# Altium PCB NO2-CO2 Sensor.PcbDoc
Units mil, origin at the board's own origin, x right, y up, seen from the top; angles counter-clockwise.
Board outline 1525 x 1175 mil, 2 copper layers (Top Layer, Bottom Layer); 13 components, 14 nets, 52 pads, 7 vias.
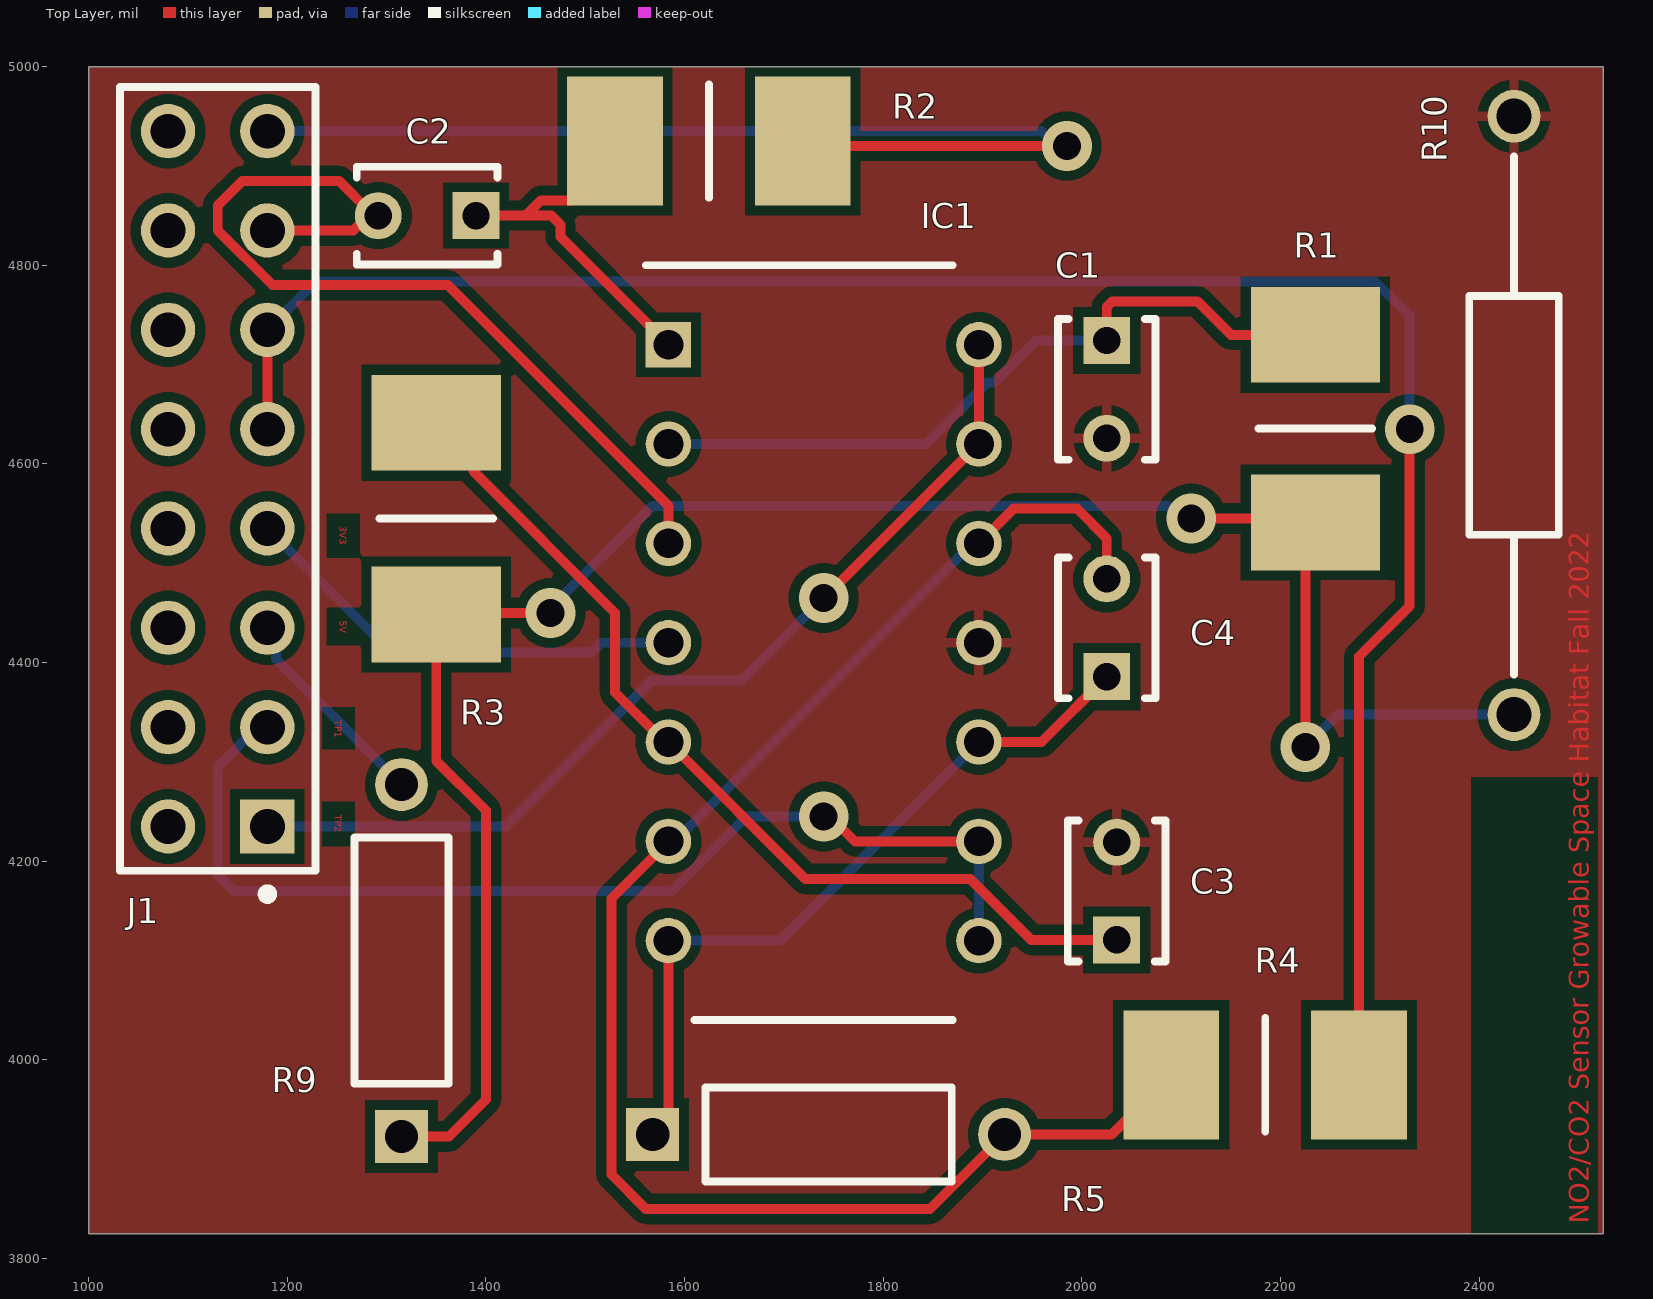
[diagram p0: Top Layer view]
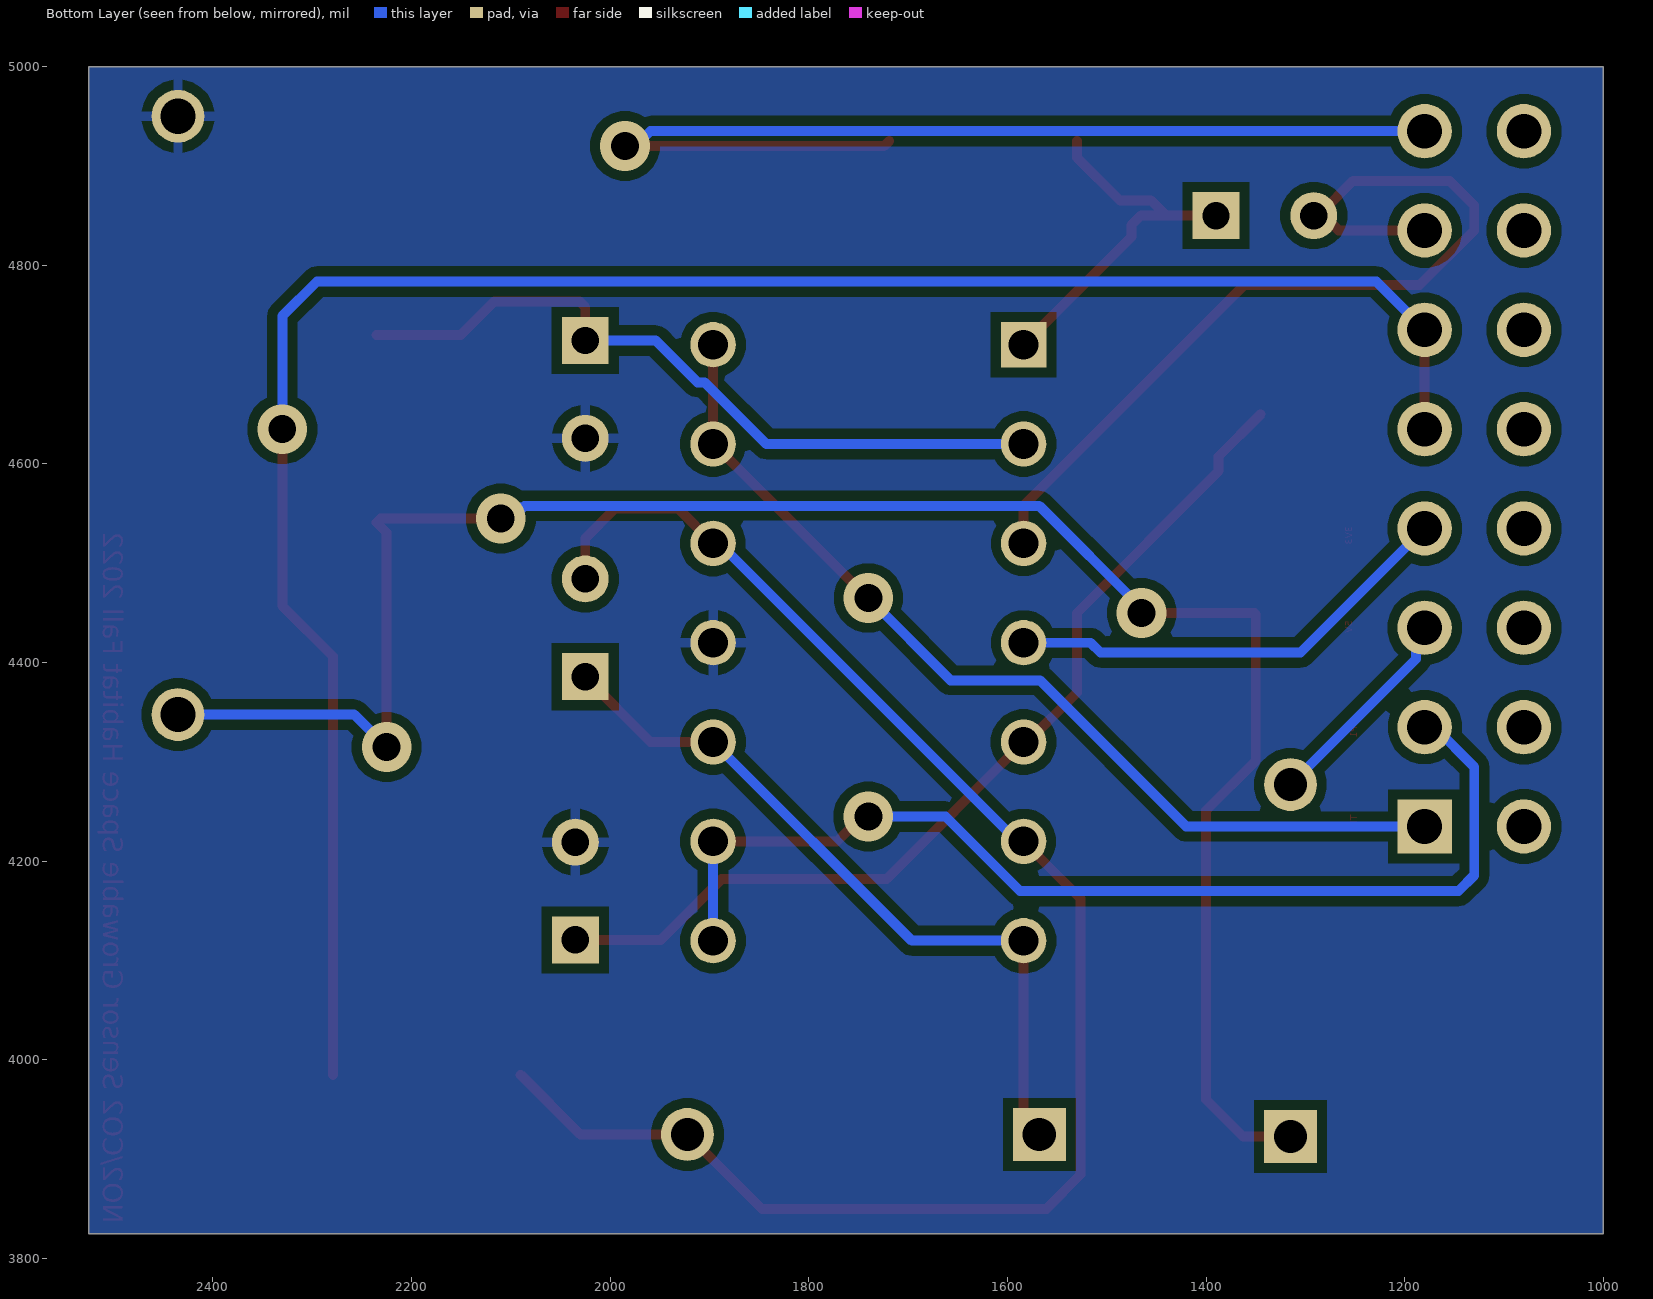
[diagram p1: Bottom Layer view, seen from below]
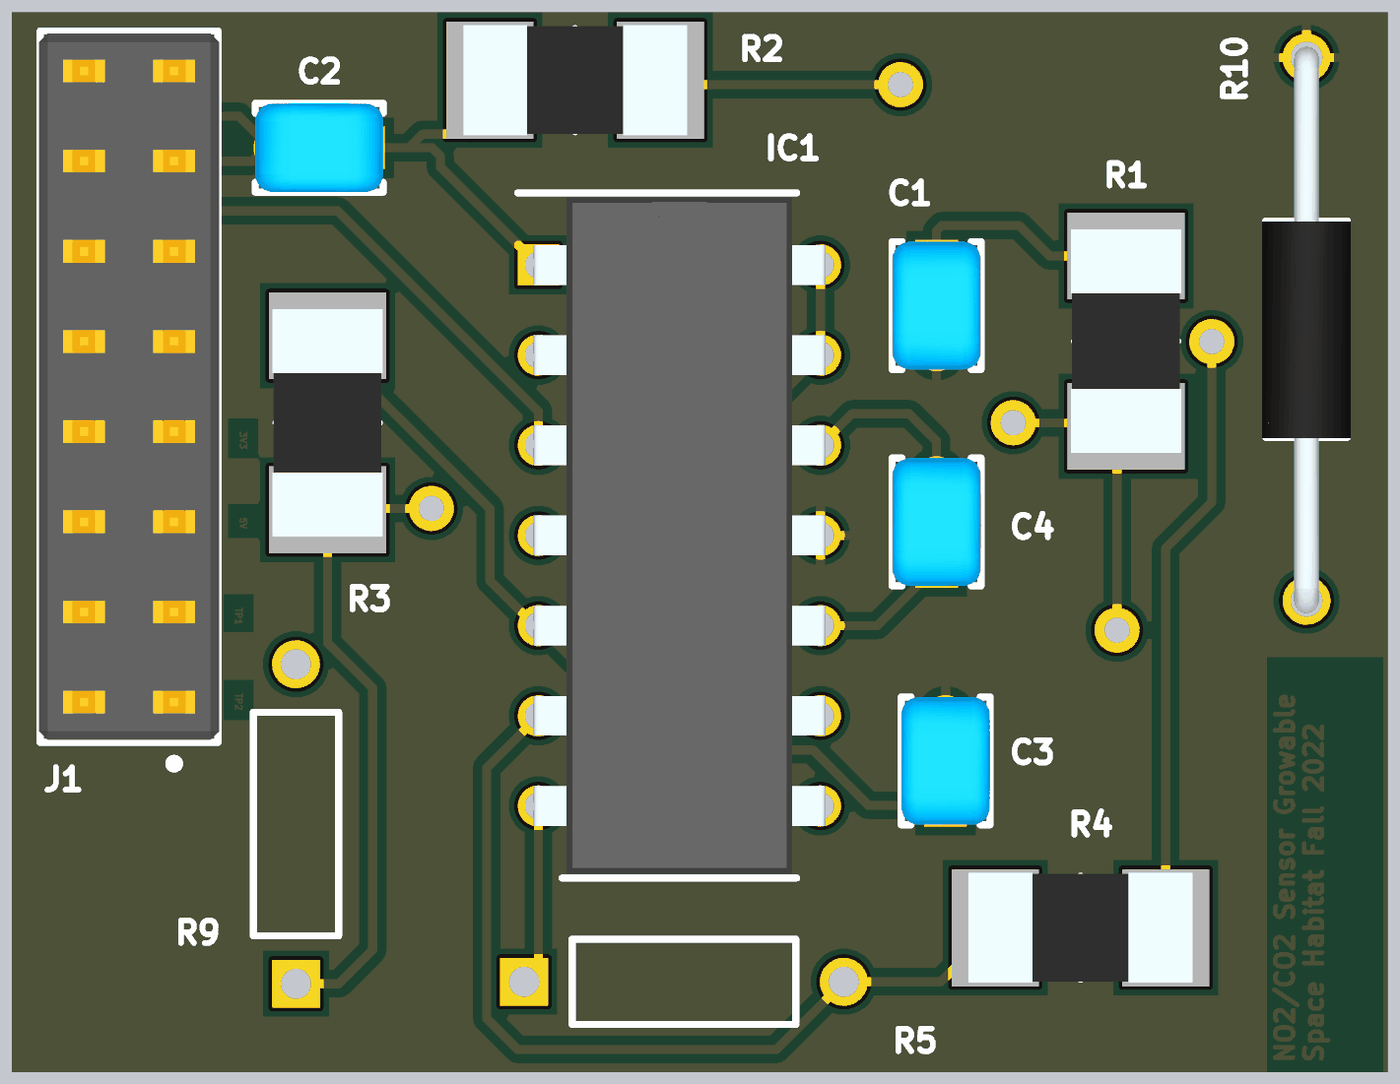
[diagram p2: 3D render of the assembled board from above, using the file's embedded part models]

## Layer stack, top to bottom
Top Solder: solder mask 0.4, Solder Resist, Dk 3.5
Top Layer: signal copper 1.4
Dielectric 1: dielectric 12.6, FR-4, Dk 4.8
Bottom Layer: signal copper 1.4
Bottom Solder: solder mask 0.4, Solder Resist, Dk 3.5

## Board outline
1000,5000 2525,5000 2525,3825 1000,3825

## Design rules (kind name [scope] priority, off if disabled: settings)
Clearance [All] p1: gap=10 ignorepadtopadclearanceinfootprint=FALSE except(0: Arc-Hole Track-Hole SMDPad-Hole THPad-Hole Via-Hole Fill-Hole Poly-Hole Region-Hole Text-Hole)
PolygonConnect [All] p1: connectstyle=Relief reliefconductorwidth=10 reliefentries=4 polygonreliefangle="90 Angle" airgapwidth=10
RoutingVias [All] p1: holewidth=28 width=50 viastyle="Through Hole" minholewidth=28 minwidth=50 maxholewidth=28 maxwidth=50
SilkToSilkClearance [All] p1: silktosilkclearance=7.85
SilkToSolderMaskClearance [IsPad] p1: minsilkscreentomaskgap=9.83 clearancetoexposedcopper=TRUE
SolderMaskExpansion [All] p1: expansion=4 istentingtop=FALSE
Width [All] p1: maxlimit=10 minlimit=10 preferedwidth=10
28 further rules are at their usual default settings.

## Components (designator, comment, footprint, x,y, rotation, side; value= is the part's Value field where it differs from the comment)
C1 ".1uF/100pF" FP-RCE0DB-MFG 2025,4675 r270 top
C2 ".1uF/100pF" FP-RCE0DB-MFG 1340.79,4850 r180 top
C3 ".1uF/100pF" FP-RCE0DB-MFG 2035,4170 r90 top
C4 ".1uF/100pF" FP-RCE0DB-MFG 2025,4435 r90 top
IC1 "MCP6004-I_P" DIP794W56P254L1905H432Q14N 1740,4420 r0 top
J1 "" FP-87227-8-MFG 1130,4585 r90 top
R1 "CRM2512-FX-10R0ELF" RESC6331X80N 2235,4635.51 r90 top
R2 "CRM2512-FX-10R0ELF" RESC6331X80N 1624.49,4925 r0 top
R3 "CHP2512AFX-47R0ELF" RESC6431X130N 1350,4545 r90 top
R4 "CRM2512-FX-10R0ELF" RESC6331X80N 2184.49,3985 r0 top
R5 "100k" RESA60-630X240 1745,3925 r0 top
R9 "MFR-25FBF52-1K" RESA60-630X240 1315,4100 r90 top
R10 "CMF554K0000FKEA" RESAD1526W69L610D229 2435,4347.64 r90 top

## Footprints (in the part's own frame and the unit in brackets; to place one, negate y for a bottom-side part, rotate by r counter-clockwise, add the part's x,y. Pads: shape width x height; smd on the part's side, far side on the other; paste and mask are expansions set on the pad)
DIP794W56P254L1905H432Q14N [mm]
  rect 1.16x1.16 hole 0.76: 1(-3.97,7.62)
  round 1.16 hole 0.76: 2(-3.97,5.08) 3(-3.97,2.54) 4(-3.97,0) 5(-3.97,-2.54) 6(-3.97,-5.08) 7(-3.97,-7.62) 8(3.97,-7.62) 9(3.97,-5.08) 10(3.97,-2.54) 11(3.97,0) 12(3.97,2.54) 13(3.97,5.08) 14(3.97,7.62)
  silkscreen extent -4.55,-9.65 3.3,9.65, body extent -4.11,-9.53 4.11,9.53, height 4.32
FP-87227-8-MFG [mil]
  rect 54.69x54.69 hole 35 paste-39370.1 mask+0: 1(-350,-50)
  round 54.69 hole 35 paste-39370.1 mask+0: 2(-350,50) 3(-250,-50) 4(-250,50) 5(-150,-50) 6(-150,50) 7(-50,-50) 8(-50,50) 9(50,-50) 10(50,50) 11(150,-50) 12(150,50) 13(250,-50) 14(250,50) 15(350,-50) 16(350,50)
  silkscreen extent -423,-99 394,99, body extent -398,-102 398,102, height 10
FP-RCE0DB-MFG [mm]
  rect 1.2x1.2 hole 0.7 paste-1000 mask+0: 1(-1.25,0)
  round 1.2 hole 0.7 paste-1000 mask+0: 2(1.25,0)
  silkscreen extent -1.8,-1.25 1.8,1.25, body extent -1.95,-1.35 1.95,1.35, height 0.25
RESA60-630X240 [mm] "Axial Resistor, 2-Leads, Dia 2.4mm, Body Length 6.3mm"
  rect 1.35x1.35 hole 0.85: 1(-4.5,0)
  round 1.35 hole 0.85: 2(4.5,0)
  silkscreen extent -3.15,-1.2 3.15,1.2, body extent -3.15,-1.2 3.15,1.2, height 2.4
RESAD1526W69L610D229 [mm]
  round 1.35 hole 0.9: 1(0,0) 2(15.3,0)
  silkscreen extent 1.02,-1.14 14.28,1.14, body extent -0.34,-1.24 15.61,1.24, height 2.48
RESC6331X80N [mm]
  rect 2.45x3.3 smd: 1(-2.4,0) 2(2.4,0)
  silkscreen extent 0,-1.45 0,1.45, body extent -3.15,-1.55 3.15,1.55, height 0.8
RESC6431X130N [mm]
  rect 2.45x3.3 smd: 1(-2.45,0) 2(2.45,0)
  silkscreen extent 0,-1.45 0,1.45, body extent -3.2,-1.55 3.2,1.55, height 1.3

## Part data
C1 C2 C3 C4: library part CMP-06035-022164-1, "Cap Ceramic 100pF 100V C0G ±5% Radial 2.5mm +125°C Ammo Pack", Capacitance=100pF, Case/Package=Radial, Dielectric=C0G, Max Operating Temperature=125°C, Min Operating Temperature=-55°C, Package Quantity=2000, Ratings=AEC-Q200, Resistor Type=Ceramic, Tolerance=5%, Voltage Rating=100V, Height=3.5mm, Height - Seated (Max)=0.138inch, Lead Diameter=0.5mm, Lead Pitch=0.098inch, Lead/Base Style=Straight, Length=0.142inch, Mount="Through Hole", Packaging="Tape and Reel", Termination=Radial, Voltage Rating (DC)=100V, Width=0.098inch
IC1: "Integrated Circuit", Arrow Part Number=MCP6004-I/P, Manufacturer_Name=Microchip, Mouser Part Number=579-MCP6004-I/P, Arrow Price/Stock=https://www.arrow.com/en/products/mcp6004-ip/microchip-technology?region=nac, Datasheet Link=http://componentsearchengine.com/Datasheets/1/MCP6004-I_P.pdf, Height=4.32mm, Manufacturer_Part_Number=MCP6004-I/P, Mouser Price/Stock=https://www.mouser.co.uk/ProductDetail/Microchip-Technology-Atmel/MCP6004-I-P?qs=VLwvNDPaIpqIfz2%252Bgie0oA%3D%3D
J1: library part CMP-03369-000064-1, "CONN HEADER VERT 16POS 2.54MM", Current Rating=3A, Manufacturer="TE Connectivity", Manufacturer Part Number=87227-8, Package=0, Temperature="-65°C to +105°C", Temperature Range High=+105°C, Temperature Range Low=-65°C, Automotive=No, Category=Conn, ComponentLink2Description=Datasheet, ComponentLink2URL=https://www.te.com/usa-en/product-87227-8.datasheet.pdf, Conn Gender=Male, Conn Orientation=Straight, Contact Material=Gold,Nickel, Device Class L1=Connectors, Device Class L2="Headers and Wire Housings", Device Class L3=unset, Digikey Description="CONN HEADER VERT 16POS 2.54MM", Footprint Url=https://www.te.com/commerce/DocumentDelivery/DDEController?Action=showdoc&DocId=Customer+Drawing%7F87227%7FH4%7Fpdf%7FEnglish%7FENG_CD_87227_H4.pdf%7F87227-8, Height=0.428inch, Lead Free=Yes, Mouser Description="Headers & Wire Housings UNSHRD VERT DUAL 16", Number Of Contacts=16, Number Of Rows=2, Octopart=https://octopart.com/87227-8-te+connectivity-39407754, Pitch=2.54mm, RoHS=TRUE
R1 R2 R4: "Resistor", Manufacturer_Name=Bourns, Mouser Part Number=652-CRM2512FX10R0ELF, Arrow Part Number=CRM2512-FX-10R0ELF, Arrow Price/Stock=https://www.arrow.com/en/products/crm2512-fx-10r0elf/bourns, Datasheet Link=http://www.bourns.com/data/global/pdfs/CRM0805_1206_2010.pdf, Height=0.8mm, Manufacturer_Part_Number=CRM2512-FX-10R0ELF, Mouser Price/Stock=https://www.mouser.co.uk/ProductDetail/Bourns/CRM2512-FX-10R0ELF?qs=9fn1gpisni4uwEopCkMdhg%3D%3D
R3: "Resistor", Manufacturer_Name=Bourns, Mouser Part Number=652-CHP2512AFX-47R0L, Datasheet Link=https://www.bourns.com/products/resistors/thick-film-chip-resistors/product/CHP2512A, Height=1.3mm, Manufacturer_Part_Number=CHP2512AFX-47R0ELF, Mouser Price/Stock=https://www.mouser.co.uk/ProductDetail/Bourns/CHP2512AFX-47R0ELF?qs=GedFDFLaBXGsr5kcmTJx%252BQ%3D%3D
R5: library part CMP-1659-00073-1, "Axial Resistor, 100 KOhm, +/- 1%, 0.25 W, -55 to 155 degC, 2-Pin THD, RoHS, Bulk", Case\Package=Axial, Max Operating Temperature="155 degC", Min Operating Temperature="-55 degC", Package Quantity=200, Power Rating="250 mW", Resistance="475 Ohm", Tolerance=1%, Voltage Rating="250 V", ComponentLink1Description="Manufacturer URL", ComponentLink1URL=http://www.yageo.com/, ComponentLink2Description=Datasheet, ComponentLink2URL=http://www.yageo.com/documents/recent/Yageo%20LR_MFR_2013.pdf, DatasheetVersion=Apr-13, Length="0.248 inch", Mount="Through Hole", PackageDescription="2-Pin Axial Lead, Dia 2.4 mm, Body Length 6.3 mm", PackageReference=MFR-25, Packaging=Bulk, RoHSCompliant=true
R9: library part CMP-1659-00075-1, "Axial Resistor, 1 KOhm, +/- 1%, 250 mW, -55 to 155 degC, 2-Pin THD, RoHS, Bulk", Case\Package=Axial, Max Operating Temperature="155 degC", Min Operating Temperature="-55 degC", Package Quantity=200, Power Rating="250 mW", Resistance="10 kohm", Tolerance=1%, Voltage Rating="250 V", ComponentLink1Description="Manufacturer URL", ComponentLink1URL=http://www.yageo.com/, ComponentLink2Description=Datasheet, ComponentLink2URL=http://www.yageo.com/documents/recent/Yageo%20LR_MFR_2013.pdf, DatasheetVersion=Apr-13, Length="0.248 inch", PackageDescription="2-Pin Axial Lead, Dia 2.4 mm, Body Length 6.3 mm", PackageReference=MFR-25, Packaging=Bulk, RoHSCompliant=true
R10: "Resistor", Manufacturer_Name=Vishay, Mouser Part Number=71-CMF554K0000FKEA, Datasheet Link=https://componentsearchengine.com/Datasheets/1/CMF554K0000FKEA.pdf, Manufacturer_Part_Number=CMF554K0000FKEA, Mouser Price/Stock=https://www.mouser.com/Search/Refine.aspx?Keyword=71-CMF554K0000FKEA

## Via types
v1: diameter 50, hole 28, Top Layer to Bottom Layer, 7 vias

## Nets (pads, with @x,y where several pads share a name; then routed paths per layer and width w, separated by ;. In a path a pad name is that pad's centre, name@x,y a point inside that pad or via, vN(x,y) a via of type N, cw(c..) or ccw(c..) an arc to the next point about the centre after c; other vN are vias at no path point)
3V3: IC1.4 J1.7 | length 459.6
  Bottom Layer w10: J1.7 1305,4410 1506.24,4410 1516.24,4420 IC1.4
5V: J1.5 R9.2 | length 213.8
  Bottom Layer w10: J1.5 1188.55,4426.45 1188.55,4403.62 R9.2
CE1: J1.15 R2.2 | length 1079.3
  Top Layer w10: R2.2 1723.98,4920 v1(1985,4920)
  Bottom Layer w10: J1.15 1959.18,4935 1974.18,4920 v1(1985,4920)
GND: C1.2 C3.2 IC1.11 R10.2
NetR1_1: R1.1 R3.1 R9.1 R10.1 | length 2003.4
  Top Layer w10: R9.1 1362.83,3922.83 1400,3960 1400,4250.96 1350,4300.96 R3.1 1351.46,4450 v1(1465,4450) ; v1(2110,4545) 2231.02,4545 R1.1 2225,4531.02 v1(2225,4315)
  Bottom Layer w10: v1(1465,4450) 1465,4454.81 1568.03,4557.83 2086.34,4557.83 2099.18,4545 v1(2110,4545) ; v1(2225,4315) 2257.64,4347.64 R10.1
PIN1: C2.1 IC1.1 R2.1 | length 385.3
  Top Layer w10: C2.1 1440.18,4850 ; R2.1 1530,4908.27 1486.77,4865.04 1455.22,4865.04 1440.18,4850 ; IC1.1 1475,4828.7 1475,4840.71 1465.71,4850 1440.18,4850
PIN2: C1.1 IC1.2 R1.2 | length 744.5
  Top Layer w10: C1.1 2025,4757.87 2030.86,4763.72 2116.28,4763.72 2150,4730 R1.2
  Bottom Layer w10: IC1.2 1842.79,4620 1904.96,4682.17 1911.97,4682.17 1954.02,4724.21 C1.1
PIN3: C2.2 IC1.3 J1.13 | length 927.1
  Top Layer w10: J1.13 1266.5,4835 1281.5,4850 1286.95,4850 C2.2 ; C2.2@1284.23,4852.73 1251.95,4885 1155,4885 1130,4860 1130,4835 1185,4780 1361.57,4780 1583.7,4557.87 IC1.3
PIN5: C3.1 IC1.5 R3.2 | length 964.9
  Top Layer w10: R3.2@1345,4650 1387.37,4607.63 1387.37,4592.63 1530,4450 1530,4370 1580,4320 IC1.5 1721.54,4182.17 1887.64,4182.17 1949.02,4120.79 C3.1
PIN6: C4.2 IC1.6 IC1.12 R4.1 R5.2 | length 1626.5
  Top Layer w10: IC1.6 1526.26,4162.56 1526.26,3884.6 1560.86,3850 1847.17,3850 R5.2 2030,3925 R4.1 ; IC1.12 1931.3,4555 1995,4555 2025,4525 C4.2
  Bottom Layer w10: IC1.6 1590,4220 1890,4520 IC1.12
PIN7: C4.1 IC1.7 IC1.10 R5.1 | length 753
  Top Layer w10: R5.1 1583.7,3940.87 IC1.7 ; IC1.10 1959.21,4320 C4.1
  Bottom Layer w10: IC1.7 1696.3,4120 IC1.10
TP1: IC1.8 IC1.9 J1.3 | length 1090
  Top Layer w10: v1(1740,4245) 1746.57,4245 1771.57,4220 IC1.9
  Bottom Layer w10: J1.3 1170,4335 1130,4295 1130,4185.86 1145.86,4170 1587.21,4170 1662.21,4245 v1(1740,4245) ; IC1.8 IC1.9
TP2: IC1.13 IC1.14 J1.1 | length 975.8
  Top Layer w10: v1(1740,4465) 1740.65,4465 1895.65,4620 IC1.13 IC1.14
  Bottom Layer w10: J1.1 1420,4235 1567.17,4382.17 1657.17,4382.17 v1(1740,4465)
WE1: J1.9 J1.11 R4.2 | length 2069.5
  Top Layer w10: J1.9 J1.11 ; R4.2 2278.98,4406.02 2330,4457.05 v1(2330,4635)
  Bottom Layer w10: J1.11 1228.62,4783.62 2295.15,4783.62 2330,4748.77 v1(2330,4635)
pads on no net: J1.2 J1.4 J1.6 J1.8 J1.10 J1.12 J1.14 J1.16

## Polygon pours and split planes (outlines as drawn)
GND on Bottom Layer "2-GND" (solid, pour order 1): 1000,5000 2525,5000 2525,3825 1000,3825
GND on Top Layer "2-GND" (solid, pour order 0): 1000,5000 2525,5000 2525,3825 1000,3825

## Other copper
Top Layer:
  text "3V3" at 1253,4537 h7 r270
  text "5V" at 1253,4442 h7 r270
  text "TP1" at 1248,4342 h7 r270
  text "TP2" at 1248,4247 h7 r270
  text "NO2/CO2 Sensor Growable Space Habitat Fall 2022" at 2510,3835 h20 r90